# Altium PCB PCB_BanTay_v1-copy_2025-10-16.pcbdoc (part 2 of 2)
Units mm, origin at the board's own origin, x right, y up, seen from the top; angles counter-clockwise.
Board outline 154.82 x 105.03 mm, 2 copper layers (Top Layer, Bottom Layer); 136 components, 142 nets, 546 pads, 572 vias.
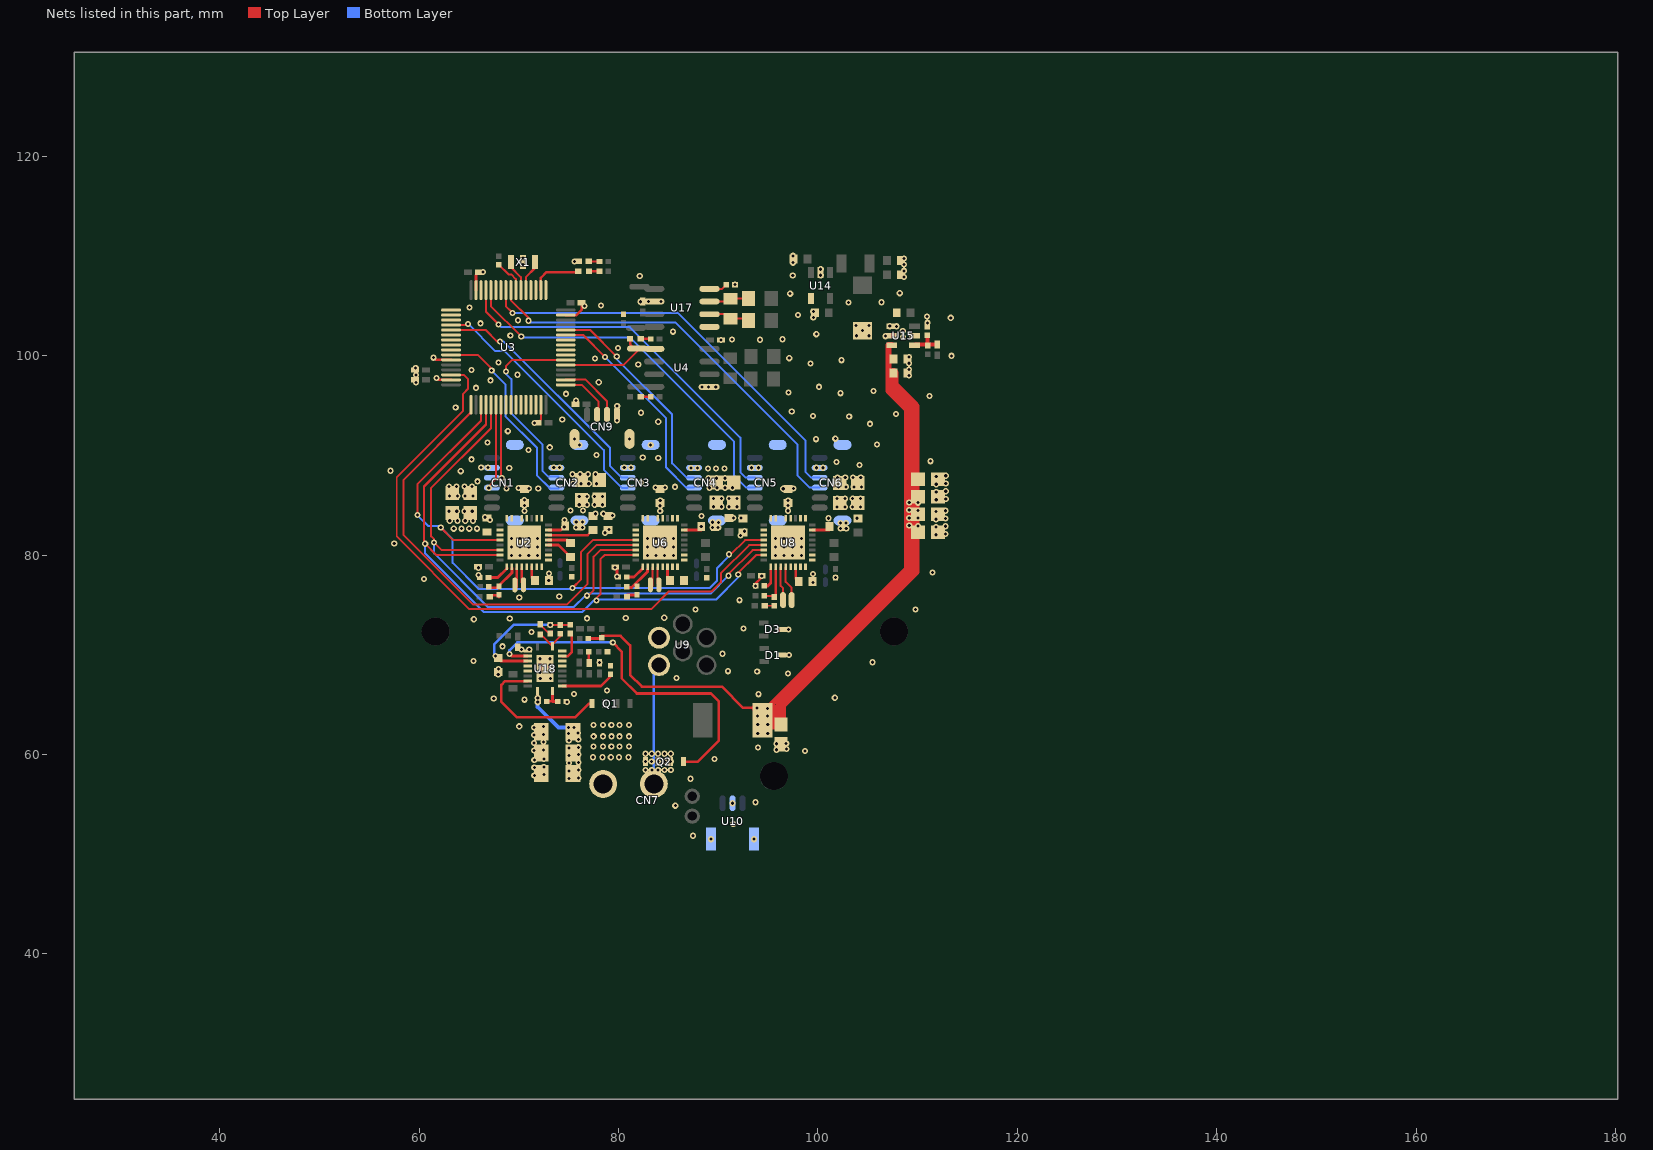
[diagram p2: the nets of this part, all layers, seen from the top]

## Via types
v1: diameter 0.62, hole 0.31, Top Layer to Bottom Layer, tented both sides, 572 vias

## Nets (pads, with @x,y where several pads share a name; then routed paths per layer and width w, separated by ;. In a path a pad name is that pad's centre, name@x,y a point inside that pad or via, vN(x,y) a via of type N, cw(c..) or ccw(c..) an arc to the next point about the centre after c; other vN are vias at no path point) (continued)
GND: C1.1 C2.1 C3.1 C4.1 C5.2 C6.1 C7.2 C9.1 C10.1 C11.1 C12.1 C13.1 C14.1 C16.1 C17.1 C18.1 C20.2 C24.1 C25.1 C26.2 C27.2 C29.1 C30.1 C31.1 C32.1 C33.1 C34.1 C35.1 C36.1 C37.1 C38.1 C39.1 C40.1 C41.1 C43.2 C46.1 C47.1 C50.1 C51.2 C52.1 C53.1 C54.1 CN1.5 CN1.7 CN2.5 CN2.7 CN2.8 CN3.5 CN3.7 CN4.5 CN4.7 CN4.8 CN5.5 CN5.7 CN6.5 CN6.7 CN6.8 CN7.2 CN9.4 CN9.5 CN9.6 D1.3 D3.3 LED1.1 Q2.1 Q2.2 Q2.3 R2.1 R4.1 R6.1 R9.1 R11.2 R12.2 R13.2 R25.1 R28.1 R39.1 R42.1 R48.1 U1.2 U2.5 U2.7 U2.8 U2.9 U2.10 U2.17 U2.18 U2.23 U2.24 U2.33 U3.15 U3.27 U3.31 U3.47 U3.63 U4.5 U5.2 U6.5 U6.7 U6.8 U6.9 U6.10 U6.17 U6.18 U6.23 U6.24 U6.33 U7.2 U8.5 U8.7 U8.8 U8.9 U8.10 U8.17 U8.18 U8.23 U8.24 U8.33 U9.1 U10.2 U10.4 U10.5 U14.2 U15.1 U17.2 U18.6 U18.12 U18.15 U18.21 U19.1 U20.1 U21.1 X1.2 | length 24.5
  Top Layer w0.2: C2.1@71.895,93.28 72.2,93.585 U3.47@72.2,95.07
  Top Layer w0.254: v1(61.44,99.79) 61.66,99.57 U3.27@63.2,99.57 ; v1(61.74,97.77) 61.939,97.57 U3.31@63.2,97.57 ; U3.15@65.7,106.57 65.7,108.075 C17.1@65.995,108.37 66.005,108.38 v1(66.39,108.38) ; U3.63@74.7,104.07 75.77,104.07 76.285,104.585 C16.1@76.285,105.3 ; v1(79.62,78.76) 79.84,78.54 v1(79.84,77.86) ; v1(93.747,76.9) 93.746,77.147 94.356,77.756 C53.1@94.356,77.911
  Bottom Layer w0.254: CN7.2@83.535,57.035 83.535,68.438 U9.1@84.055,68.958
  other v1: 89.28,51.5 93.58,51.5 87.45,51.84 91.5,53.01 85.69,54.86 91.43,55.1 93.73,55.2 87.21,57.56 71.55,57.896 72.5,57.977 82.7,58.45 83.335,58.45 83.97,58.45 84.605,58.45 85.24,58.45 71.55,58.673 72.5,58.753 82.685,59.285 83.32,59.285 83.955,59.285 84.59,59.285 85.225,59.285 71.55,59.45 72.5,59.53 89.62,59.53 82.69,60.07 83.325,60.07 83.96,60.07 84.595,60.07 85.23,60.07 98.71,60.33 71.52,60.38 72.47,60.46 95.83,60.47 96.84,60.53 93.99,60.68 95.83,61.07 96.81,61.1 71.52,61.157 72.47,61.237 71.52,61.933 72.47,62.014 71.52,62.71 72.47,62.79 70.04,62.82 74.83,65.26 70.57,65.49 67.48,65.62 101.69,65.68 75.54,66.05 94.04,66.04 78.85,66.4 72.14,67.6 73.16,67.6 85.8,67.68 67.93,68 97,68.13 72.13,68.24 73.15,68.27 93.9,68.31 90.99,68.35 67.94,68.57 72.13,68.94 73.15,68.94 78.1,69.21 105.48,69.24 65.46,69.38 72.12,69.58 72.12,69.595 73.14,69.595 73.14,69.61 97.1,69.96 90.41,70.1 70.25,70.51 71.04,70.53 68.35,70.84 71.27,72.27 97.03,72.54 92.53,72.63 65.48,73.56 69.08,73.63 76.84,73.65 80.72,73.68 84.58,73.71 87.7,74.55 109.79,74.55 92.14,75.47 70.04,75.74 74.05,75.85 99.5,77.26 73,77.441 60.48,77.58 101.76,77.737 94.355,77.91 65.96,77.98 99.5,78.1 73.02,78.14 111.48,78.25 65.96,78.72 69.26,79.937 70.127,79.937 70.993,79.937 71.86,79.937 82.89,79.937 83.757,79.937 84.623,79.937 85.49,79.937 95.728,79.937 96.595,79.937 97.462,79.937 98.328,79.937 69.26,80.803 70.127,80.803 70.993,80.803 71.86,80.803 82.89,80.803 83.757,80.803 84.623,80.803 85.49,80.803 95.728,80.803 96.595,80.803 97.462,80.803 98.328,80.803 57.5,81.14 69.26,81.67 70.127,81.67 70.993,81.67 71.86,81.67 82.89,81.67 83.757,81.67 84.623,81.67 85.49,81.67 95.728,81.67 96.595,81.67 97.462,81.67 98.328,81.67 92.22,81.97 111.83,82.03 112.78,82.11 78.65,82.23 92.62,82.38 79.03,82.57 102.27,82.66 102.83,82.66 75.74,82.76 89.43,82.76 89.99,82.76 76.36,82.77 111.83,82.807 112.78,82.887 102.25,83.22 102.81,83.22 89.43,83.29 90.01,83.28 75.75,83.3 76.37,83.31 67.1,83.52 111.83,83.584 112.78,83.664 66.61,83.79 111.83,84.36 112.78,84.44 111.86,85.54 112.81,85.62 63.06,85.92 63.837,85.92 64.613,85.92 65.39,85.92 111.86,86.316 112.81,86.396 96.52,86.65 68.75,86.67 71.94,86.67 71.03,86.68 97.54,86.68 69.98,86.71 89.11,86.75 89.886,86.75 90.663,86.75 91.44,86.75 83.69,86.76 84.66,86.76 85.67,86.84 102.04,86.84 102.816,86.84 103.593,86.84 104.37,86.84 62.98,86.87 63.756,86.87 64.533,86.87 65.31,86.87 111.86,87.093 75.45,87.15 76.227,87.15 77.003,87.15 77.78,87.15 112.81,87.173 82.24,87.26 65.86,87.39 89.03,87.7 89.806,87.7 90.67,87.7 101.96,87.79 102.736,87.79 103.513,87.79 104.29,87.79 111.86,87.87 112.81,87.95 75.37,88.1 76.146,88.1 76.923,88.1 77.7,88.1 64.17,88.41 57.13,88.45 88.98,88.68 89.756,88.68 90.62,88.68 69.03,88.74 74.09,88.76 87.25,88.74 87.93,88.74 93.34,88.75 94.02,88.75 99.83,88.75 100.51,88.75 73.5,88.77 80.57,88.77 81.25,88.77 66.22,88.79 66.9,88.79 104.15,89.02 101.87,89.32 111.29,89.41 65.25,89.6 83.98,89.74 82.42,89.78 77.78,90.04 70.97,90.54 73.1,90.8 76.07,91.05 83.218,91.05 105.92,91.08 66.85,91.3 99.8,91.62 75.59,91.645 81.09,91.645 101.74,91.67 68.89,92.42 105.21,93.16 71.55,93.25 83.98,93.37 79.84,93.48 74.35,93.6 103.13,93.89 99.5,93.93 107.83,94.14 82.25,94.27 97.37,94.38 63.66,94.78 79.86,94.93 75.72,95.48 111.17,95.96 74.73,96.17 102.26,96.23 97.04,96.29 105.57,96.46 65.7,96.77 89.02,96.85 89.747,96.845 88.347,96.865 100.09,96.87 59.69,97.31 78.01,97.33 67.14,97.52 109.14,98 59.683,98.061 69.87,98.08 65.26,98.57 109.14,98.617 59.65,98.77 81.97,99.1 99.24,99.21 109.14,99.233 67.96,99.31 102.37,99.54 77.63,99.72 97.12,99.74 109.14,99.85 113.39,99.98 79.93,100.77 90.275,101.57 91.38,101.61 94.18,101.59 96.44,101.64 108.53,101.86 69.14,102.03 99.83,102.15 85.46,102.4 108.5,102.48 107.2,102.95 107.88,102.94 66.14,103.24 110.97,103.29 69.91,103.55 113.32,103.79 99.53,103.83 110.94,103.91 98,104.08 99.53,104.43 65.06,104.82 76.58,104.97 78.25,105.03 103.07,105.33 106.38,105.35 82.2,105.4 83.01,105.44 84.24,105.44 97.21,106.21 108.2,106.26 91.673,107.12 91.673,107.12 108.625,107.89 82.12,107.97 97.47,108.02 100.27,108.06 108.625,108.507 100.27,108.66 108.625,109.123 70.42,109.14 97.5,109.32 75.58,109.45 108.625,109.74 70.41,109.79 97.49,110.01
L1_1: C8.2 L1.1 U15.2
  other v1: 106.78,101.95 103.85,101.99 105.1,101.99 104.46,102.502 103.82,103.03 105.13,103.04
LED6_2: LED6.2 R15.1 | length 0.9
  Top Layer w0.254: LED6.2@82.278,95.87 R15.1@83.217,95.87
NRST: R41.1 U3.7 | length 3.4
  Top Layer w0.2: R41.1@67.98,109.117 68.957,108.14 69.22,108.14 69.7,107.66 U3.7@69.7,106.57
R3_1: LED3.1 R3.1 | length 0.7
  Top Layer w0.28: 67.398,75.96 67.827,75.96 R3.1@68.01,75.777
R5_1: R5.1 R7.2 U6.2 | length 3
  Top Layer w0.28: R5.1@80.823,76.81 80.823,76.733 81.313,76.733 82.901,78.321 U6.2@82.901,78.533
R6_2: R6.2 U6.1 | length 2.1
  Top Layer w0.28: R6.2@80.803,77.79 81.548,77.79 82.42,78.662 U6.1@82.42,78.817
R7_1: LED7.1 R7.1 | length 1.2
  Top Layer w0.28: LED7.1@80.838,75.82 80.838,75.997 R7.1@81.85,75.997
R8_1: R8.1 R10.2 U8.2 | length 3.9
  Top Layer w0.2: R8.1@94.593,75.9 95.503,75.9 R10.2@95.61,75.793
  Top Layer w0.28: R10.2@95.61,75.793 95.758,75.793 U8.2@95.758,78.507
R9_2: R9.2 U8.1 | length 2.1
  Top Layer w0.28: R9.2@94.613,76.9 94.961,76.9 95.258,77.197 U8.1@95.258,78.508
R10_1: LED5.1 R10.1 | length 1
  Top Layer w0.2: LED5.1@94.658,74.91 R10.1@95.61,74.927
R14_1: LED8.2 R14.1 | length 1
  Top Layer w0.254: LED8.2@82.227,101.68 R14.1@83.237,101.67
R22_2: LED1.2 R22.2 | length 1
  Top Layer w0.2: LED1.2@77.068,109.44 R22.2@78.087,109.44
R25_2: R25.2 U18.2 | length 5.4
  Top Layer w0.28: U18.2@74.37,66.861 78.221,66.861 79.19,67.83 R25.2@79.19,68.027
R31_1: R28.2 R31.1 U18.1 | length 2.7
  Top Layer w0.254: R31.1@72.783,65.31 R28.2@73.887,65.31
  Top Layer w0.28: U18.1@73.371,66.359 73.371,65.31 R28.2@73.887,65.31
R35_1: LED10.1 R35.1 U18.10 | length 3.3
  Top Layer w0.2: LED10.1@72.131,71.99 72.24,71.99 U18.10@73.372,70.86 73.373,71.063 74.15,71.84 R35.1@74.15,72.117
R38_1: C15.1 R38.1 R39.2 U15.4 | length 3.3
  Top Layer w0.4: U15.4@109.689,101.04 109.774,101.125 C15.1@111.95,101.125 ; R39.2@110.95,102.037 110.99,101.997 R38.1@110.99,101.013
R40_1: LED9.2 R40.1 | length 1
  Top Layer w0.254: LED9.2@77.038,108.45 R40.1@78.087,108.45
R42_2: R42.2 U17.8 | length 1.9
  Top Layer w0.2: U17.8@89.122,106.695 89.122,106.665 90.352,106.665 R42.2@90.807,107.12
R46_2: C28.2 R46.2 | length 1.2
  Top Layer w0.28: R46.2@77.003,70.3 77.003,69.185 C28.2@77.07,69.185
R47_2: LED10.2 R47.2 | length 1.7
  Top Layer w0.2: LED10.2@72.131,73.237 72.131,73.019 72.852,72.298 73.32,72.298 R47.2@73.32,72.328
R51_1: C29.2 R35.2 R47.1 R51.1 U18.14 | length 13.2
  Top Layer w0.2: R47.1@73.15,73.163 73.32,72.993 R51.1@75.15,72.993
  Top Layer w0.28: v1(67.65,69.86) 68.15,69.36 U18.14@70.872,69.36
  Bottom Layer w0.254: v1(67.65,69.86) 67.55,69.86 67.55,71.07 69.473,72.993 v1(73.15,72.993)
R51_2: R51.2 U18.8 | length 3.1
  Top Layer w0.254: U18.8@74.371,69.862 74.922,69.862 75.291,70.23 75.291,72.128 R51.2@75.151,72.128
R64_1: F5.1 R64.1 U17.6 | length 4.2
  Top Layer w0.2: U17.6@89.122,104.155 90.785,104.155 R64.1@91.23,103.71 92.857,103.71 F5.1@93.037,103.53
R64_2: F4.1 R64.2 U17.7 | length 4
  Top Layer w0.2: U17.7@89.122,105.425 90.945,105.425 R64.2@91.23,105.71 92.998,105.71 F4.1@93.037,105.75
RO: LED8.1 pad.1@81.87,100.71 U3.53 U4.1 | length 11
  Top Layer w0.2: U3.53@74.7,99.07 80.51,99.069 81.719,100.278 82.116,100.675 U4.1@83.579,100.675
  Top Layer w0.254: LED8.1@81.151,101.68 81.151,101.137 81.58,100.71 pad.1@81.87,100.71
S$104313: 
S$116245: 
S$116265: 
SCK: U2.28 U3.35 U6.28 U8.28 | length 72.2
  Top Layer w0.2: v1(59.82,84) 59.82,87.101 66.2,93.481 U3.35@66.2,95.071 ; v1(62.16,82.76) 63.42,81.5 U2.28@68.107,81.5 ; v1(75.38,76.69) 76.251,77.561 76.251,80.319 77.429,81.5 U6.28@81.737,81.5 ; v1(91.07,80.08) 91.27,80.08 92.69,81.5 U8.28@94.576,81.5
  Bottom Layer w0.2: v1(59.82,84) 60.909,82.91 62.009,82.91 63.35,81.571 63.35,79.209 65.969,76.59 75.281,76.59 v1(75.38,76.69) 89.139,76.689 89.87,77.421 89.87,78.66 91.07,79.86 v1(91.07,80.08)
SDI: U2.30 U3.37 U6.30 U8.30 | length 71.1
  Top Layer w0.2: v1(61.5,81.25) 62.251,80.499 U2.30@68.107,80.5 ; v1(61.5,81.25) 61.501,81.569 61.209,81.861 61.209,86.73 67.201,92.722 U3.37@67.201,95.071 ; v1(76.82,75.92) 76.96,75.92 77.49,76.451 77.49,79.829 78.161,80.499 U6.30@81.737,80.5 ; v1@91.021,77.921 91.021,78.071 93.449,80.499 U8.30@94.576,80.5
  Bottom Layer w0.2: v1(61.5,81.25) 61.501,80.159 66.85,74.81 75.53,74.81 76.639,75.92 v1(76.82,75.92) 76.82,76.131 89.231,76.131 v1(91.02,77.92)
SDO: U2.31 U3.36 U6.31 U8.31 | length 72.6
  Top Layer w0.2: U3.36@66.7,95.071 66.7,93.09 60.48,86.87 60.48,81.2 60.551,81.129 v1(60.6,81.13) 61.732,79.999 U2.31@68.107,80 ; v1(77.77,75.44) 77.77,75.65 78.179,76.059 78.179,79.56 78.621,79.999 U6.31@81.737,80 ; v1(92,78.06) 92,78.2 93.8,80 U8.31@94.576,80
  Bottom Layer w0.2: v1(60.6,81.13) 60.599,80.151 66.449,74.299 76.38,74.299 77.521,75.44 v1(77.77,75.44) 77.859,75.531 89.771,75.531 91.999,77.759 v1@91.999,78.061
SPI2_NSS1: U3.33 U6.29 | length 46.3
  Top Layer w0.2: U3.33@65.199,95.071 65.199,94.299 58.41,87.51 58.41,82.039 65.418,75.031 74.821,75.031 76.86,77.07 76.86,80.08 77.78,81 U6.29@81.737,81
SPI2_NSS2: U3.30 U8.29 | length 63.6
  Top Layer w0.2: U3.30@63.2,98.071 64.468,98.071 64.879,97.66 64.879,96.649 64.399,96.169 64.399,94.449 57.75,87.799 57.75,81.861 65.029,74.581 83.282,74.581 85.039,76.339 89.339,76.339 90.249,77.248 90.249,78.16 93.089,81 U8.29@94.576,81
SWCLK: CN9.3 U3.50 | length 6.4
  Top Layer w0.2: U3.50@74.699,97.583 76.695,97.583 78.839,95.442 CN9.3@78.839,94.096
SWDIO: CN9.2 U3.49 | length 5.4
  Top Layer w0.2: U3.49@74.699,97.07 76.289,97.07 77.991,95.369 77.991,94.096 CN9.2@77.841,94.096
TIM1_CH1: CN6.3 U3.8 | length 41.9
  Top Layer w0.2: U3.8@69.2,106.57 69.2,105.57 70.95,103.82 v1(70.95,103.5)
  Bottom Layer w0.2: v1(70.95,103.5) 70.95,103.34 85.68,103.34 97.93,91.09 97.93,87.98 99.16,86.75 CN6.3@100.16,86.75
TIM1_CH2: CN6.4 U3.9 | length 42.1
  Top Layer w0.2: U3.9@68.7,106.57 68.7,104.96 69.21,104.45 69.21,104.42 v1(69.35,104.28)
  Bottom Layer w0.2: v1(69.35,104.28) 85.9,104.28 85.93,104.31 98.76,91.48 98.76,88.31 99.32,87.75 CN6.4@100.16,87.75
TIM2_CH1: CN5.3 U3.12 | length 37.6
  Top Layer w0.2: U3.12@67.2,106.57 67.2,104.96 v1(70.24,101.92)
  Bottom Layer w0.2: v1(70.24,101.92) 70.36,101.8 81.15,101.8 91.59,91.36 91.59,87.95 92.79,86.75 CN5.3@93.66,86.75
TIM2_CH2: CN5.4 U3.13 | length 38.1
  Top Layer w0.2: U3.13@66.7,106.57 66.7,104.39 67.87,103.22 67.96,103.13 v1(67.96,103.12)
  Bottom Layer w0.2: v1@67.96,103.121 68.23,102.849 81.13,102.849 92.21,91.769 92.21,88.31 92.771,87.751 CN5.4@93.66,87.751
TIM3_CH1: CN3.3 U3.20 | length 25.7
  Top Layer w0.2: U3.20@63.2,103.07 64.8,103.07 v1(64.91,103.18)
  Bottom Layer w0.2: v1(64.91,103.18) 67.648,100.441 68.6,100.441 78.529,90.509 78.529,88.531 80.33,86.73 CN3.3@80.917,86.73
TIM3_CH2: CN3.4 U3.21 | length 24.9
  Top Layer w0.2: U3.21@63.2,102.57 66.68,102.57 67.84,101.41 v1(68.1,101.41)
  Bottom Layer w0.2: v1@68.1,101.411 68.471,101.411 79.149,90.73 79.149,88.912 80.31,87.751 CN3.4@80.917,87.751
TIM4_CH1: CN4.3 U3.59 | length 22.1
  Top Layer w0.2: U3.59@74.7,102.07 76.43,102.07 v1(78.65,99.85)
  Bottom Layer w0.2: v1@78.649,99.849 84.77,93.73 84.77,88.78 86.799,86.75 CN4.3@87.57,86.75
TIM4_CH2: CN4.4 U3.60 | length 22
  Top Layer w0.2: U3.60@74.7,102.57 77.15,102.57 v1(79.82,99.9)
  Bottom Layer w0.2: v1(79.82,99.9) 79.82,99.651 85.38,94.091 85.38,89.189 86.82,87.751 CN4.4@87.569,87.751
TIM5_CH1: CN2.3 U3.26 | length 19.9
  Top Layer w0.2: U3.26@63.2,100.07 65.87,100.07 67.269,98.671 v1@67.269,98.5
  Bottom Layer w0.2: v1@67.269,98.5 68.651,97.121 68.651,93.921 71.839,90.733 71.839,87.972 73.139,86.672 73.95,86.672 CN2.3@73.95,86.699
  other v1: 67.27,98.5
TIM5_CH2: CN2.4 U3.54 | length 20.3
  Top Layer w0.2: v1(68.7,98.41) 68.699,98.94 69.329,99.57 U3.54@74.7,99.57
  Bottom Layer w0.2: v1(68.7,98.41) 68.699,98.19 69.251,97.639 69.251,94.208 72.39,91.068 72.39,88.409 72.949,87.85 73.98,87.85 CN2.4@73.98,87.741
TIM8_CH1: CN1.3 U3.38 | length 8.6
  Top Layer w0.2: v1(66.98,86.73) 66.98,86.9 67.701,87.622 U3.38@67.701,95.071
TIM8_CH2: CN1.4 U3.39 | length 7.4
  Top Layer w0.2: U3.39@68.2,95.07 68.2,87.82 v1(68.28,87.74)
U2_1: R4.2 U2.1 | length 2.2
  Top Layer w0.28: R4.2@66.953,77.75 67.885,77.75 U2.1@68.799,78.664
U2_2: R3.2 R43.1 U2.2 | length 3.6
  Top Layer w0.28: R43.1@66.983,76.71 67.757,76.71 R3.2@67.98,76.933 ; R3.2@68.01,76.643 68.01,76.93 69.298,78.218 U2.2@69.298,78.664
U2_3: pad.4@69.6,76.99 U2.3 | length 2.1
  Top Layer w0.254: pad.4@69.6,76.99 69.62,76.99 69.798,76.812 U2.3@69.798,78.664
U2_4: pad.3 U2.4 | length 1.7
  Top Layer w0.254: U2.4@70.298,78.664 70.298,77.282 70.46,77.12 pad.3@70.46,77.01
U2_6: U1.1 U2.6 | length 1.5
  Top Layer w0.28: U2.6@71.28,78.819 71.28,77.761 U1.1@71.6,77.441
U2_12: C21.2 U2.12 | length 2.7
  Top Layer w0.28: U2.12@72.932,81 73.98,81 C21.2@75.18,79.8
U2_13: C21.1 U2.13 | length 2.4
  Top Layer w0.28: U2.13@72.932,81.5 74.88,81.5 C21.1@75.18,81.2
U2_14: C19.1 U2.14 | length 4.7
  Top Layer w0.254: U2.14@72.972,82 76.91,82 C19.1@77.44,82.53
U3_1: U3.1
U3_2: LED9.1 U3.2 | length 5.3
  Top Layer w0.254: U3.2@72.2,106.57 72.2,107.809 72.761,108.371 75.941,108.371 LED9.1@76.022,108.45
U3_3: U3.3
U3_4: U3.4
U3_5: U3.5 X1.3 | length 3.2
  Top Layer w0.2: U3.5@70.7,106.57 70.701,107.87 71.618,108.79 X1.3@71.619,109.38
U3_6: U3.6 X1.1 | length 3.2
  Top Layer w0.2: X1.1@69.221,109.38 69.22,108.838 70.201,107.86 U3.6@70.2,106.57
U3_10: U3.10
U3_11: U3.11
U3_14: U3.14
U3_17: U3.17
U3_18: U3.18
U3_19: U3.19
U3_22: U3.22
U3_23: U3.23
U3_24: U3.24
U3_25: U3.25
U3_40: U3.40
U3_41: U3.41
U3_42: U3.42
U3_43: U3.43
U3_44: U3.44
U3_45: U3.45
U3_46: U3.46
U3_55: U3.55
U3_56: U3.56
U3_57: U3.57
U3_58: U3.58
U5_1: U5.1 U6.6 | length 1.4
  Top Layer w0.28: U6.6@84.92,78.778 84.92,77.68 U5.1@85.14,77.46
U6_3: pad.7 U6.3 | length 2.1
  Top Layer w0.2: pad.7@83.19,76.81 83.278,76.81 83.409,76.941 U6.3@83.409,78.729
U6_4: pad.6 U6.4 | length 2
  Top Layer w0.2: U6.4@83.909,78.728 83.909,77.16 84.04,77.03 pad.6@84.04,76.76
U7_1: U7.1 U8.6 | length 1.4
  Top Layer w0.28: U8.6@97.77,78.607 97.77,77.63 U7.1@98.07,77.33
U8_3: pad.8 U8.3 | length 3
  Top Layer w0.2: U8.3@96.248,78.736 96.248,76.913 96.499,76.659 pad.8@96.499,75.8
U8_4: pad.9 U8.4 | length 3.2
  Top Layer w0.2: U8.4@96.748,78.737 96.748,77.312 97.36,76.7 pad.9@97.36,75.8
U14_4: U14.4
U15_5: U15.5
U17_5: U17.5
U18_7: U18.7
U18_9: U18.9
U18_13: Q2.4 U18.13 | length 36
  Top Layer w0.254: v1@79.421,71.211 80.31,70.319 80.31,67.639 81.839,66.11 89.251,66.11 90.061,65.3 90.061,61.391 87.955,59.285 Q2.4@86.495,59.285
  Top Layer w0.28: v1(69.05,70.06) 69.248,69.861 U18.13@70.869,69.861
  Bottom Layer w0.254: v1(69.05,70.06) 69.05,70.431 69.86,71.241 79.169,71.241 79.2,71.211 v1@79.421,71.211
  other v1: 79.42,71.21
U18_16: U18.16
U18_18: Q1.4 U18.18 | length 14.8
  Top Layer w0.254: U18.18@70.872,67.36 68.621,67.36 68.24,66.979 68.24,65.259 69.789,63.71 75.649,63.71 77.043,65.104 Q1.4@77.325,65.105
VIN: CN7.1 R31.2 U9.2 U18.20 U19.2 U20.2 U21.2 | length 6.5
  Top Layer w0.28: U18.20@71.87,66.36 71.87,65.76 71.917,65.713 R31.2@71.917,65.31
  Bottom Layer w0.4: v1@71.89,65.671 v1(71.89,65.24) 71.89,64.779 73.98,62.689 v1(74.98,62.69) v1(75.54,62.71)
  other v1: 75.02,57.57 75.97,57.65 75.02,58.347 75.97,58.427 75.02,59.124 75.97,59.204 77.43,59.72 78.38,59.72 79.22,59.72 80.03,59.72 80.98,59.72 75.02,59.9 75.97,59.98 75.01,60.63 75.96,60.71 77.48,60.8 78.43,60.8 79.27,60.8 80.08,60.8 81.03,60.8 75.01,61.407 75.96,61.487 77.5,61.813 78.45,61.813 79.29,61.813 80.1,61.813 81.05,61.813 74.989,62.08 75.94,62.16 77.48,62.95 78.43,62.95 79.27,62.95 80.08,62.95 81.03,62.95 71.89,65.67
VOUT: C4.2 C5.1 C6.2 C9.2 C10.2 C18.2 C19.2 C23.2 C24.2 C26.1 C30.2 C31.2 C32.2 C33.2 C34.2 C35.2 C36.2 C37.2 C38.2 C39.2 C40.2 C41.2 C46.2 C49.2 C50.2 C51.1 C52.2 CN1.8 CN3.8 CN5.8 L2.2 R49.2 R50.2 U2.15 U2.20 U2.21 U2.26 U2.27 U6.15 U6.20 U6.21 U6.26 U6.27 U8.15 U8.20 U8.21 U8.26 U8.27 U15.3 | length 119.9
  Top Layer w0.2: v1(93.9,64.67) 94.88,64.67 v1(94.93,64.62) 96.29,63.26 C41.2@96.29,63.02
  Top Layer w0.254: R50.2@78.31,71.717 78.311,71.881 80.201,71.881 81.151,70.931 81.151,67.97 82.329,66.791 90.368,66.791 92.489,64.67 v1(93.9,64.67)
  Top Layer w0.28: R49.2@76.973,71.63 78.222,71.63 R50.2@78.31,71.717
  Top Layer w0.3: U2.15@72.972,82.501 74.231,82.501 v1(74.55,82.82) ; U6.15@86.601,82.501 88.29,82.501 v1(88.29,82.869) ; U8.15@99.441,82.5 101.14,82.5 C50.2@101.14,82.86
  Top Layer w0.6: v1(94.93,64.62) 108.951,78.64 108.951,94.558 107.069,96.44 107.069,101.04 U15.3@107.391,101.04
  Top Layer w1: v1(93.9,64.67) 95.41,64.67 95.41,63.019 C41.2@96.29,63.02 96.289,64.97 109.68,78.361 109.68,94.919 107.589,97.009 C10.2@107.59,98.25
  other v1: 93.955,62.08 94.96,62.08 93.955,63 94.96,63 93.945,63.86 94.95,63.86 63.47,82.64 64.246,82.64 65.023,82.64 65.8,82.64 110.02,82.92 109.15,82.95 63.07,83.44 63.847,83.44 64.623,83.44 65.4,83.44 74.56,83.51 101.04,83.69 103.92,83.69 110.02,83.697 91.51,83.716 92.286,83.716 109.15,83.726 88.33,83.9 79.4,83.96 77.693,84.14 78.47,84.14 62.99,84.39 63.766,84.39 64.543,84.39 65.32,84.39 70.55,84.42 84.17,84.43 97,84.44 76.44,84.45 75.19,84.47 110.02,84.473 109.15,84.503 101.926,84.81 102.703,84.81 103.48,84.81 104.256,84.81 89.53,84.84 90.307,84.84 91.083,84.84 91.86,84.84 84.17,84.94 97,84.95 70.546,84.968 76.05,85.04 76.827,85.04 77.603,85.04 78.38,85.04 110.02,85.25 109.15,85.28 84.18,85.46 97.01,85.47 70.546,85.498 101.926,85.65 102.703,85.65 103.48,85.65 104.256,85.65 89.53,85.68 90.307,85.68 91.083,85.68 91.86,85.68 76.05,85.88 76.827,85.88 77.603,85.88 78.38,85.88
copper on no net: | length 0

## Polygon pours and split planes (outlines as drawn)
+3.3V on Mid-Layer 2 (solid): 51.22,113.38 52.75,111.85 118.78,111.85 119.29,111.34 119.29,67.91 96.81,45.3 96.81,39.34 91.35,44.8 68.24,44.8 47.92,65.12 47.92,94.2
+3.3V on Mid-Layer 2 (solid): 72.98,116.34 74.51,114.81 140.54,114.81 141.05,114.3 141.05,70.87 118.57,48.26 118.57,42.3 113.11,47.76 90,47.76 69.68,68.08 69.68,97.16
+3.3V on Mid-Layer 2 (solid): 86.61,116.34 88.14,114.81 154.17,114.81 154.68,114.3 154.68,70.87 132.2,48.26 132.2,42.3 126.74,47.76 103.63,47.76 83.31,68.08 83.31,97.16
+3.3V on Mid-Layer 2 (solid): 99.448,116.34 100.978,114.81 167.008,114.81 167.518,114.3 167.518,70.87 145.038,48.26 145.038,42.3 139.578,47.76 116.468,47.76 96.148,68.08 96.148,97.16
GND on Mid-Layer 1 (solid): 48.47,117.73 114.32,117.73 128.11,103.94 128.11,85.26 110.51,67.66 110.51,40.26 108.69,42.08 56.81,42.08 43.2,55.69 43.2,116.1
VIN on Bottom Layer (solid): 84.1,70.64 84.09,70.63 83.17,70.56 82.57,69.64 82.45,68.37 82.43,61.55 81.28,56.5 79.92,55.14 77.04,55.14 74.65,57.53 74.65,62.83 74.96,63.14 76.79,63.14 79.67,66.02 79.67,69.53 80.18,71.38 81.42,72.82 82.99,72.85 84.17,72.85
VOUT on Bottom Layer (solid): 61.93,84.83 62.27,85.17 68.88,85.17 69.62,85.91 74.63,85.91 75,86.28 79.58,86.28 79.71,86.15 82.36,86.15 82.63,85.88 85.1,85.88 85.4,86.18 95.5,86.18 95.79,85.89 97.77,85.89 98.1,86.2 105.28,86.2 105.31,86.17 109.58,86.17 110.77,84.96 110.77,84.85 110.69,84.75 110.69,83.1 110.69,82.78 109.21,81.3 64.05,81.4 61.89,83.67 61.89,83.82
GND on Bottom Layer (solid): 50.28,114.83 51.01,115.56 151.52,115.56 144.98,109.02 137.37,109.02 126.12,97.77 126.12,48.97 118.5,41.35 66.79,41.35 45.02,63.12 45.02,100.13
DRV1_OUT1 on Top Layer (solid): 66.63,86.09 68.733,86.095 69.93,85.05 69.93,84 69.94,83.32 69.61,83.31 69.61,84.03 68.8,84.8 68.12,85.38 66.633,85.405 66.583,85.455 66.583,85.605 66.433,85.755
DRV1_OUT0 on Top Layer (solid): 66.62,85.16 67.88,85.16 67.89,85.15 67.93,85.15 68.415,84.72 68.46,82.79 67.69,82.81 67.7,83.46 67.72,83.99 67.435,84.17 66.86,84.19 66.43,84.62 66.43,84.9 66.4,84.93
VOUT on Top Layer (solid): 72.675,82.665 73.625,82.655 73.975,83.255 73.975,83.735 74.97,84.63 75.01,86.21 78.75,86.23 79.71,84.49 78.28,83.34 75.7,83.34 75.19,82.83 75.205,82.335 72.735,82.325 72.525,82.535
VOUT on Top Layer (solid): 68.465,82.605 67.785,82.605 67.595,82.605 67.275,82.925 66.155,82.925 66.135,82.945 65.85,84.95 64.5,84.9 62.6,84.95 62.62,82.92 63.6,81.87 68.435,81.835 68.455,81.815
DRV3_OUT0 on Top Layer (solid): 93.02,85.13 94.28,85.13 94.29,85.12 94.33,85.12 94.91,84.53 94.91,82.78 94.16,82.79 94.17,83.25 93.26,84.16 92.83,84.59 92.83,84.87 92.8,84.9
DRV3_OUT1 on Top Layer (solid): 92.96,86.11 95.51,86.1 96.44,85.31 96.44,84.11 96.45,83.28 96.09,83.3 96.07,84.03 94.62,85.4 92.96,85.41 92.91,85.46 92.91,85.61 92.76,85.76
VOUT on Top Layer (solid): 94.885,82.575 94.6,82.64 94.26,82.63 94.12,83.04 93.03,84.22 91.22,84.23 91.18,83.29 91.17,82.71 92.895,81.805 94.855,81.805 94.875,81.785
VOUT on Top Layer (solid): 99.145,82.685 100.095,82.675 100.445,83.275 101.015,84.315 101.51,84.52 101.57,85.95 104.67,85.94 104.65,84.24 104.63,83.21 103.43,83.3 102.055,83.575 101.815,83.305 101.825,82.355 99.205,82.345 98.995,82.555
DRV2_OUT0 on Top Layer (solid): 80.27,85.12 81.53,85.12 81.54,85.11 81.58,85.11 82.11,84.52 82.1,83.06 82.1,82.83 81.37,82.81 81.36,83.1 81.11,83.55 80.51,84.15 80.08,84.58 80.08,84.86 80.05,84.89
DRV2_OUT1 on Top Layer (solid): 80.225,86.12 82.495,86.13 83.565,85.19 83.585,83.98 83.585,83.24 83.255,83.23 83.235,83.97 82.925,84.49 81.935,85.43 81.535,85.437 80.245,85.44 80.145,85.487 80.055,85.8
VOUT on Top Layer (solid): 82.105,82.595 81.425,82.595 81.235,82.595 81.07,83.01 79.66,84.55 77.74,84.54 77.75,83.31 78.3,82.91 80.115,81.825 82.075,81.825 82.095,81.805
VOUT on Top Layer (solid): 86.37,82.68 87.32,82.67 87.67,83.27 87.69,83.85 89.04,85.01 89.05,86 92.27,85.97 92.24,84.52 92.91,84.18 91.45,83.56 89.21,83.52 88.9,83.21 88.9,82.35 86.43,82.34 86.22,82.55
DRV1_OUT2 on Top Layer (solid): 74.53,86.095 71.77,86.095 71.22,85.525 71.17,83.895 71.18,83.225 71.46,83.205 71.45,83.915 71.95,84.425 72.58,85.035 73.09,85.405 74.42,85.405 74.47,85.455 74.47,85.465 74.63,85.625
DRV1_OUT3 on Top Layer (solid): 73.195,85.17 73.135,85.17 72.655,84.73 72.655,82.8 73.305,82.79 73.595,82.8 73.785,82.95 74.645,83.72 74.635,84.93 74.395,85.17
DRV2_OUT2 on Top Layer (solid): 88.29,86.09 85.53,86.09 84.79,85.62 84.77,83.98 84.8,83.32 85.11,83.33 85.11,84.03 86.49,85.4 88.18,85.4 88.31,85.46 88.43,85.74
DRV2_OUT3 on Top Layer (solid): 86.815,85.18 86.755,85.18 86.275,84.74 86.275,82.81 86.925,82.8 87.215,82.81 87.7,83.44 87.74,84.11 87.99,84.33 88.38,84.54 88.4,84.76 88.35,85.01 88.015,85.18
DRV3_OUT2 on Top Layer (solid): 100.98,86.11 98.22,86.11 97.67,85.54 97.59,84.02 97.58,83.33 97.92,83.33 97.92,84.01 98.4,84.44 99.03,85.05 99.43,85.41 100.87,85.42 100.92,85.47 100.92,85.48 101.08,85.64
DRV3_OUT3 on Top Layer (solid): 99.63,85.22 99.57,85.22 99.09,84.78 99.09,82.85 99.74,82.84 100.03,82.85 100.22,83 101.08,83.77 101.07,84.98 100.83,85.22
F1_2 on Top Layer (solid): 98.54,110.26 98.96,110.6 102.83,110.62 102.91,109.92 102.85,108.21 102.36,107.74 98.99,107.75 98.76,108.16 98.57,109.2
+3.3V on Top Layer (solid): 64.12,99.2 60.55,99.2 60.4,99.05 60.4,97.04 60.55,96.89 64.19,96.89 64.16,96.92 64.16,99.21
+3.3V on Top Layer (solid): 73.93,104.41 73.94,104.42 75.57,104.42 75.62,104.47 75.62,105.78 75.54,105.86 74.04,105.86 73.7,105.52 73.7,104.52
+3.3V on Top Layer (solid): 100.56,106.36 100.51,106.31 100.51,103.68 100.64,103.55 101.88,103.55 102.02,103.69 102.02,105.82 101.41,106.43 101.08,106.43
+5V on Top Layer (solid): 104.63,110.28 104.63,108.23 104.34,107.94 103.41,107.94 103.47,107.88 103.47,106.22 103.75,105.94 106.93,105.94 107.39,106.4 107.39,110.26 107.22,110.43 104.97,110.43
L1_1 on Top Layer (solid): 108.24,104.78 103.97,104.78 103.35,104.16 103.35,101.86 103.69,101.52 106.68,101.52 106.88,101.72 107.89,101.72 107.92,101.75 107.92,102.23 106.75,102.23 106.74,102.24 106.74,102.31 106.41,102.64 106.41,103.18 106.83,103.6 108.34,103.6 108.37,103.63
C42_1 on Top Layer (solid): 78.32,64.7 78.96,64.06 81.53,64.06 82.36,63.23 82.36,60.87 82.49,60.72 88.11,60.72 89.09,61.7 89.42,61.7 88.48,62.64 88.48,65.2 88.17,65.51 82.44,65.51 82.42,65.49 80.09,65.49 80.01,65.57 78.35,65.57
VIN on Top Layer (solid): 74.7,63.15 76.86,63.15 77.17,63.46 81.38,63.46 81.7,63.14 81.7,58.49 81.28,56.53 79.94,55.17 79.87,55.1 76.95,55.1 74.55,57.5 74.55,63.15
+3.3V on Top Layer (solid): 65.3,108.65 65.31,108.64 65.31,105.79 64.41,106.69 64.41,108.63
+3.3V on Top Layer (solid): 68.41,79.68 68.37,79.64 64.93,79.64 64.77,79.48 64.77,76.24 65.58,75.43 66.35,75.43 66.5,75.58 66.5,77.07 66.39,77.18 65.47,77.18 65.34,77.31 65.34,79.18 65.38,79.22 66.53,79.22 66.53,78.38 67.67,78.4 68.46,79.29 68.46,79.63
+3.3V on Top Layer (solid): 82.09,79.37 81.24,78.52 81.16,78.52 81.12,78.56 80.44,78.56 80.35,78.65 80.35,79.1 80.14,79.31 79.37,79.33 79.04,78.97 79.05,77.6 79.35,77.3 80.19,77.3 80.22,77.27 80.22,75.54 79.4,75.54 78.67,76.27 78.66,79.22 79.1,79.65 82.06,79.65
+3.3V on Top Layer (solid): 94.91,79.35 94.86,79.3 94.42,79.3 93.67,78.55 93.67,77.63 93.16,77.12 93.16,76.44 93.42,76.18 93.95,76.18 94.05,76.08 94.05,74.68 93.94,74.56 93.7,74.56 93.67,74.59 93.12,74.59 92.75,74.96 92.75,78.29 94.18,79.72 94.91,79.72
+3.3V on Top Layer (solid): 72.59,95.66 73.68,94.57 73.68,93 73.53,92.85 72.63,92.85 72.55,92.93 72.55,93.49
VOUT on Top Layer (solid): 93.47,65.18 93.5,65.21 95.07,65.21 95.89,66.03 98.07,66.03 97.25,65.21 97.25,62.52 96.43,61.7 94.6,61.7 94.59,61.71 94.59,61.72
GND on Top Layer (solid): 38.1,114.66 39,113.76 143.69,113.76 119.56,89.63 119.56,67.31 90.9,38.65 81.82,38.65 81.27,38.1 41.73,38.1

## Keep-outs
Keep-Out Layer:
  lines w0.254: 51.975,105.833 ccw(c51.975,104.833) 50.978,104.756 ccw(c168.132,113.763) 59.723,68.447 ccw(c60.645,68.833) 60.645,67.833 ; 54.648,105.833 ccw(c54.648,106.833) 55.648,106.833 ; 55.648,109.833 cw(c56.648,109.833) 56.648,110.833 ; 64.648,67.833 cw(c64.648,66.833) 65.648,66.833 ; 65.648,65.333 ccw(c66.648,65.333) 66.648,64.333 ; 102.648,64.333 ccw(c102.648,65.333) 103.648,65.333 ; 103.648,66.833 cw(c104.648,66.833) 104.648,67.833 ; 108.651,67.833 ccw(c108.651,68.833) 109.574,68.447 ccw(c1.164,113.763) 118.318,104.756 ccw(c117.321,104.833) 117.321,105.833 ; 112.648,110.833 cw(c112.648,109.833) 113.648,109.833 ; 113.648,106.833 ccw(c114.648,106.833) 114.648,105.833

## Other copper
Top Layer:
  rectangle net VOUT: 70.18,83.38 70.92,85.02
  rectangle net VOUT: 96.595,83.34 97.385,85.26
  rectangle net VOUT: 83.78,83.34 84.54,85.26
  rectangle net GND: 65.52,77.48 66.37,79.09
  rectangle net DE: 83.07,98.15 84.28,99.52
  rectangle net VOUT: 106.91,97.16 108.09,101.3

## Silkscreen, mask and mechanical layers (free items; w line width, h text height)
Top Overlay:
  lines w0.2 net S$104313: 86.436,50.333 86.436,70.333
Document:
  lines w0.254: 66.648,64.333 73.148,64.333 cw(c73.148,62.333) 75.148,62.333 75.148,50.333 ; 94.148,50.333 94.148,62.333 ; 94.16,62.32 cw(c96.16,62.32) 96.16,64.32 ; 96.148,64.333 102.648,64.333